# EAGLE board product (EAGLE 6.3)
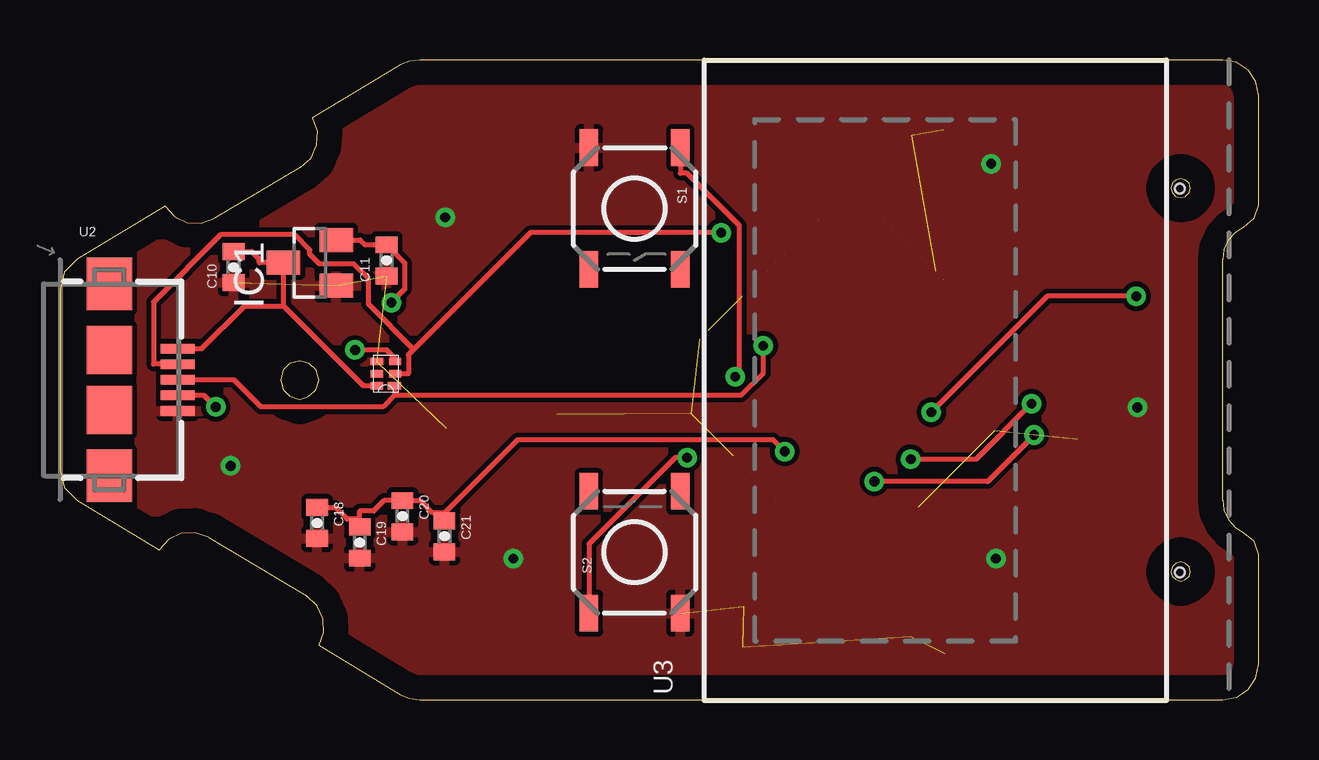
[diagram p0: board, top side]
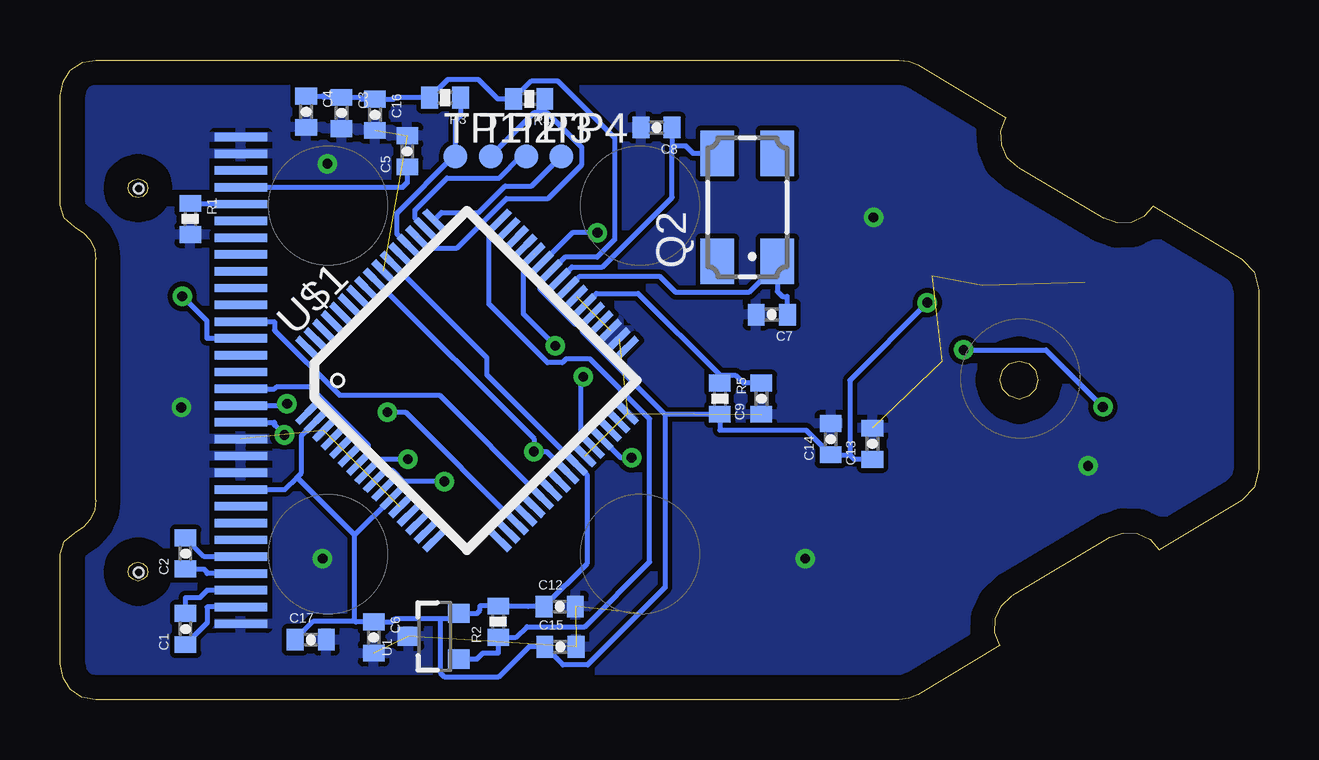
[diagram p1: board, bottom side, seen from below]

Size 49.96 x 26.67 mm. Coordinates in mm from the lower left corner, seen from the top.
Outline: 47.12,5.33 47.07,5.54 46.91,5.69 46.71,5.74 46.51,5.69 46.35,5.54 46.3,5.33 46.35,5.13 46.51,5 46.71,4.93 46.91,5 47.07,5.13 47.12,5.33
Outline: 47.12,21.34 47.07,21.54 46.91,21.67 46.71,21.72 46.51,21.67 46.35,21.54 46.3,21.34 46.35,21.13 46.51,20.98 46.71,20.93 46.91,20.98 47.07,21.13 47.12,21.34
Outline: 10.79,13.33 10.67,13.74 10.39,14.02 9.98,14.12 9.58,14.02 9.3,13.74 9.19,13.33 9.3,12.93 9.58,12.65 9.98,12.52 10.39,12.65 10.67,12.93 10.79,13.33
Outline: 4.39,20.57 0.71,18.36 0.18,17.83 0,17.07 0,9.58 0.18,8.84 0.71,8.31 4.14,6.25 4.52,6.68 5.05,6.93 5.64,6.96 6.2,6.76 10.29,4.32 10.72,3.91 10.97,3.38 11,2.79 10.79,2.26 14.2,0.2 14.58,0.05 14.99,0 48.46,0 49.05,0.1 49.53,0.43 49.83,0.91 49.96,1.5 49.96,6.05 49.78,6.6 49.35,6.96 49,7.19 48.69,7.52 48.51,7.9 48.46,8.33 48.46,18.34 48.51,18.77 48.69,19.15 49,19.48 49.35,19.71 49.78,20.07 49.96,20.62 49.96,25.17 49.83,25.76 49.53,26.24 49.02,26.57 48.46,26.67 14.99,26.67 14.58,26.62 14.2,26.47 10.54,24.26 10.74,23.7 10.69,23.11 10.46,22.58 10.03,22.2 6.45,20.07 5.89,19.86 5.31,19.89 4.78,20.14 4.39,20.57
Copper layers (1*16): Top 0.035mm / dielectric 1.5mm / Bottom 0.035mm
Design rules "default *": minimum track width 8mil, minimum drill 16mil, track to track 8mil, track to pad 8mil, pad to pad 8mil, via to via 8mil, smd to smd 8mil, copper to edge 40mil, drill to drill 8mil, minimum pad ring 8mil, minimum via ring 8mil, stop-mask expansion 4mil, vias tented up to drill 0mil, thermal gap 8mil

## Footprints (pad centres in the part's own frame; a part is rotated, then mirrored left to right if it is on the bottom)
0402-CAP = smd 0.7 x 0.9: 1 -0.65,0; 2 0.65,0
SOT23 = smd 1 x 1.4: 1 -0.95,-1.1; 2 0.95,-1.1; 3 0,1.1
CTS406 = smd 1.9 x 1.4: 1 -2.25,-1.25; 2 2.25,-1.25; 3 2.25,1.25; 4 -2.25,1.25
0402-RES = smd 0.7 x 0.9: 1 -0.65,0; 2 0.65,0
TACTILE_SWITCH_SMD = smd 1.524 x 0.762: 1 -2.54,1.905; 2 2.54,1.905; 3 -2.54,-1.905; 4 2.54,-1.905
TP10R = smd 1 x 1: TP 0,0
SOT23-3 = smd 0.8 x 0.9: 1 -0.95,-1; 2 0.95,-1; 3 0,1.1
USB-AB-MICRO-SMD = smd 1.4 x 0.4: D+ 2.85,0; D- 2.85,0.65; GND 2.85,-1.3; ID 2.85,-0.65; VBUS 2.85,1.3 | smd 1.9 x 2: P$6 0,1.25; P$7 0,-1.25 | smd 1.9 x 2.2: P$8 0,4; P$9 0,-4
UG-2864HSWEG01_0.96IN_WRAPAROUND = smd 0.35 x 2.2 bottom: 1 -10.15,-1.2; 2 -9.45,-1.2; 3 -8.75,-1.2; 4 -8.05,-1.2; 5 -7.35,-1.2; 6 -6.65,-1.2; 7 -5.95,-1.2; 8 -5.25,-1.2; 9 -4.55,-1.2; 10 -3.85,-1.2; 11 -3.15,-1.2; 12 -2.45,-1.2; 13 -1.75,-1.2; 14 -1.05,-1.2; 15 -0.35,-1.2; 16 0.35,-1.2; 17 1.05,-1.2; 18 1.75,-1.2; 19 2.45,-1.2; 20 3.15,-1.2; 21 3.85,-1.2; 22 4.55,-1.2; 23 5.25,-1.2; 24 5.95,-1.2; 25 6.65,-1.2; 26 7.35,-1.2; 27 8.05,-1.2; 28 8.75,-1.2; 29 9.45,-1.2; 30 10.15,-1.2 | hole 0.4: -8,-5.45; 8,-5.45
DRY6 = smd 0.559 x 0.305: 1 -0.356,0.508 | smd 0.508 x 0.305: 2 -0.381,0; 3 -0.381,-0.508; 4 0.381,-0.508; 5 0.381,0; 6 0.381,0.508
LQFP64 = smd 1.1 x 0.285: 1 -5.7,3.75; 2 -5.7,3.25; 3 -5.7,2.75; 4 -5.7,2.25; 5 -5.7,1.75; 6 -5.7,1.25; 7 -5.7,0.75; 8 -5.7,0.25; 9 -5.7,-0.25; 10 -5.7,-0.75; 11 -5.7,-1.25; 12 -5.7,-1.75; 13 -5.7,-2.25; 14 -5.7,-2.75; 15 -5.7,-3.25; 16 -5.7,-3.75; 33 5.7,-3.75; 34 5.7,-3.25; 35 5.7,-2.75; 36 5.7,-2.25; 37 5.7,-1.75; 38 5.7,-1.25; 39 5.7,-0.75; 40 5.7,-0.25; 41 5.7,0.25; 42 5.7,0.75; 43 5.7,1.25; 44 5.7,1.75; 45 5.7,2.25; 46 5.7,2.75; 47 5.7,3.25; 48 5.7,3.75 | smd 0.285 x 1.1: 17 -3.75,-5.7; 18 -3.25,-5.7; 19 -2.75,-5.7; 20 -2.25,-5.7; 21 -1.75,-5.7; 22 -1.25,-5.7; 23 -0.75,-5.7; 24 -0.25,-5.7; 25 0.25,-5.7; 26 0.75,-5.7; 27 1.25,-5.7; 28 1.75,-5.7; 29 2.25,-5.7; 30 2.75,-5.7; 31 3.25,-5.7; 32 3.75,-5.7; 49 3.75,5.7; 50 3.25,5.7; 51 2.75,5.7; 52 2.25,5.7; 53 1.75,5.7; 54 1.25,5.7; 55 0.75,5.7; 56 0.25,5.7; 57 -0.25,5.7; 58 -0.75,5.7; 59 -1.25,5.7; 60 -1.75,5.7; 61 -2.25,5.7; 62 -2.75,5.7; 63 -3.25,5.7; 64 -3.75,5.7

## Placement (x,y rotation side)
C1  1uF  [0402-CAP]  44.73,2.95 90 bottom
C2  1uF  [0402-CAP]  44.73,6.1 90 bottom
C3  104  [0402-CAP]  38.23,24.46 270 bottom
C4  1uF  [0402-CAP]  39.7,24.51 270 bottom
C5  1uF  [0402-CAP]  35.48,22.86 90 bottom
C6  0.1uF  [0402-CAP]  36.88,2.59 270 bottom
C7  10pF  [0402-CAP]  20.29,16.05 180 bottom
C8  10pF  [0402-CAP]  25.1,23.85 180 bottom
C9  0.1uF  [0402-CAP]  20.73,12.55 90 bottom
C10  1uF  [0402-CAP]  7.24,18.03 90 top
C11  1uF  [0402-CAP]  13.61,18.31 90 top
C12  0.1uF  [0402-CAP]  29.13,3.88 0 bottom
C13  0.01uF  [0402-CAP]  16.1,10.67 90 bottom
C14  0.1uF  [0402-CAP]  17.84,10.86 90 bottom
C15  0.01uF  [0402-CAP]  29.11,2.2 0 bottom
C16  0.01uF  [0402-CAP]  36.83,24.38 270 bottom
C17  1uF  [0402-CAP]  39.51,2.5 0 bottom
C18  1uF  [0402-CAP]  10.72,7.37 270 top
C19  0.1uF  [0402-CAP]  12.5,6.55 270 top
C20  2.2uF  [0402-CAP]  14.27,7.65 270 top
C21  0.1uF  [0402-CAP]  16.03,6.81 270 top
IC1  MCP1703CB  [SOT23]  10.41,18.21 90 top
Q2  16MHz  [CTS406]  21.31,20.52 90 bottom
R1  390k/560k  [0402-RES]  44.53,20.04 270 bottom
R2  100k  [0402-RES]  31.7,3.25 90 bottom
R3  10k  [0402-RES]  33.91,25.1 180 bottom
R4  10k  [0402-RES]  30.4,25.04 180 bottom
R5  10k  [0402-RES]  22.45,12.55 270 bottom
S1  SWITCH-MOMENTARY-2SMD  [TACTILE_SWITCH_SMD]  23.95,20.47 270 top
S2  SWITCH-MOMENTARY-2SMD  [TACTILE_SWITCH_SMD]  23.95,6.15 90 top
TP1  PTR1TP10R  [TP10R]  33.48,22.66 0 bottom
TP2  PTR1TP10R  [TP10R]  32,22.66 0 bottom
TP3  PTR1TP10R  [TP10R]  30.53,22.66 0 bottom
TP4  PTR1TP10R  [TP10R]  29.06,22.66 0 bottom
U1  ATSHA204-TSU  [SOT23-3]  34.34,2.64 90 bottom
U2  USB  [USB-AB-MICRO-SMD]  2.06,13.34 0 top
U3  DISPLAY  [UG-2864HSWEG01_0.96IN_WRAPAROUND]  41.22,13.31 90 top
U5  TPD4S012_DRY_6  [DRY6]  13.59,13.59 180 top
U$1  LM4F120H5QR  [LQFP64]  32.99,13.31 45 bottom

## Library data of the parts
C1-C21 R1-R5 = SparkFun-Passives
IC1 = linear
Q2 = crystal
S1 S2 = SparkFun-Electromechanical
TP1-TP4 = testpad
U1 = SparkFun-DigitalIC
U2 = SparkFun-Connectors
U3 = microbuilder
U5 = imported
U$1 = stellaris

## Nets
+3V3: C3.1 C4.1 C6.1 C11.2 C12.1 C13.1 C14.1 C15.1 C16.1 C17.1 IC1.2 R2.2 R3.2 R4.2 R5.2 U1.2 U3.9 U$1.2 U$1.11 U$1.26 U$1.37 U$1.42 U$1.54
+5V: C10.2 IC1.3 U2.VBUS U5.6
GND: C3.2 C4.2 C5.2 C6.2 C7.2 C8.2 C9.1 C10.1 C11.1 C12.2 C13.2 C14.2 C15.2 C16.2 C17.2 C18.2 C19.2 C20.2 C21.2 IC1.1 R1.2 S1.3 S2.3 U1.3 U2.GND U3.1 U3.10 U3.11 U3.12 U3.29 U3.30 U5.4 U$1.3 U$1.12 U$1.27 U$1.32 U$1.34 U$1.35 U$1.39 U$1.55
N$1: U3.19 U$1.22
N$2: U3.13 U$1.9
N$3: U2.ID U5.3
N$4: U3.15 U$1.7
N$5: U3.18 U$1.19
N$6: C5.1 U3.27
N$8: U3.14 U$1.8
N$9: R1.1 U3.26
N$10: C1.1 U3.2
N$11: C2.1 U3.4
N$12: C1.2 U3.3
N$13: C2.2 U3.5
N$14: S2.1 U$1.29
N$15: S1.1 U$1.28
N$16: R4.1 TP2.TP U$1.51
N$17: R3.1 TP1.TP U$1.52
N$19: TP3.TP U$1.50
N$20: TP4.TP U$1.49
N$21: C9.2 R5.1 U$1.38
N$23: C18.1 C19.1 C20.1 C21.1 U$1.25 U$1.56
SDA: R2.1 U1.1 U$1.48
USB_D_N: U2.D- U5.2 U$1.43
USB_D_P: U2.D+ U5.1 U$1.44
VCC: U3.28
VSS: U3.8
XTAL1: C7.1 Q2.1 U$1.40
XTAL2: C8.1 Q2.3 U$1.41

## Tracks (layer width: path | path; a pad name or v marks a point on that pad's centre or on a via)
+3V3  (via drill 0.41 pad 0.81)  (6 unrouted)
  Top 0.203: v13.81,16.55 14.37,17.11 14.37,18.21 C11.2 12.72,18.96 12.52,19.16 IC1.2
  Bottom 0.203: 28.19,15.64 28.48,15.64 29.96,17.12 29.96,17.41 U$1.42 28.92,18.45 27.57,18.45 26.85,19.17 26.85,23.43 29.21,25.8 30.3,25.8 R4.2 31.71,25.04 32.51,25.85 33.8,25.85 R3.2 36.01,25.1 36.07,25.03 C16.1 37.4,25.03 37.47,25.11 C3.1 38.98,25.11 39.03,25.16 C4.1 | 28.19,15.64 U$1.37 | 24.73,11.9 28.19,15.35 28.19,15.64 | U$1.54 32.16,14.25 32.16,13.54 U$1.26 27.98,9.36 27.98,5.68 C12.1 30.44,3.88 30.46,3.9 R2.2 32.08,3.9 32.45,3.9 32.45,3.72 32.59,3.59 U1.2 33.34,3.37 34.11,3.37 | 17.04,10.21 16.85,10.02 C13.1 | 17.04,10.21 C14.1 18.87,11.24 22.45,11.24 R5.2 24.73,11.9 | v13.81,16.55 17.04,13.32 17.04,10.21 | 24.73,11.9 24.73,4.68 27.96,1.45 29,1.45 C15.1 30.41,2.2 31.66,0.95 33.95,0.95 34.11,1.12 34.11,3.37 | 40.08,9.27 39.9,9.46 39.9,11 U$1.2 | 40.08,9.27 40.6,8.76 41.02,8.76 U3.9 | 37.67,6.86 40.08,9.27 | 37.67,6.86 U$1.11 | 37.67,3.28 37.67,6.86 | 37.67,3.28 37.64,3.24 C6.1 36.13,3.24 36,3.37 34.11,3.37 | C17.1 39.38,3.28 37.67,3.28
+5V
  Top 0.203: U2.VBUS 5.91,14.63 7.69,16.42 9.31,16.42 | 9.31,16.42 IC1.3 8.31,18.21 8.31,18.37 7.99,18.68 C10.2 | 9.31,16.42 12.65,13.08 U5.6
GND  (via drill 0.41 pad 0.81)  (16 unrouted)
  other vias: 7.11,9.74 16.05,20.11 18.9,5.88 39.01,5.88 38.81,22.34 44.91,12.18
  pour Bottom: 50.98,27 -1.04,27 -1.04,-0.43 50.98,-0.43
  pour Top: -1.04,27.2 50.98,27.2 50.98,-0.43 -1.04,-0.43
N$1  (1 unrouted)
  Bottom 0.203: U$1.22 34.15,12.69 38.32,12.69 41.02,15.4 41.02,15.76 U3.19
N$2  (via drill 0.41 pad 0.81)  (1 unrouted)
  Top 0.203: v40.61,11.03 38.67,9.1 v33.94,9.1
  Bottom 0.203: U3.13 41.02,11.56 41.02,11.45 v40.61,11.03 | v33.94,9.1 35.63,9.1 36.09,9.55 36.4,9.55 U$1.9
N$3  (via drill 0.41 pad 0.81)
  Top 0.203: v6.49,12.2 6.01,12.68 U2.ID | U5.3 13.97,14.23 13.62,14.58 v12.3,14.58
  Bottom 0.203: v12.3,14.58 8.87,14.58 v6.49,12.2
N$4  (1 unrouted)
  Bottom 0.203: U3.15 41.02,12.96 40.93,13.05 39.56,13.05 37.11,10.61 37.11,10.25 U$1.7
N$5  (via drill 0.41 pad 0.81)  (1 unrouted)
  Top 0.203: v44.86,16.82 41.16,16.82 v36.32,11.98
  Bottom 0.203: U3.18 43.83,15.06 43.83,15.78 v44.86,16.82 | v36.32,11.98 35.56,11.98 U$1.19
N$6
  Bottom 0.203: C5.1 35.48,21.56 35.68,21.36 U3.27
N$8  (via drill 0.41 pad 0.81)  (1 unrouted)
  Top 0.203: v40.5,12.34 38.18,10.02 v35.46,10.02
  Bottom 0.203: v35.46,10.02 36.63,10.02 U$1.8 | U3.14 40.58,12.26 v40.5,12.34
N$9
  Bottom 0.203: R1.1 43.77,20.69 43.74,20.66 U3.26
N$10
  Bottom 0.203: U3.2 43.83,3.86 43.83,3.2 C1.1
N$11
  Bottom 0.203: U3.4 43.83,5.26 43.83,5.3 43.97,5.45 C2.1
N$12
  Bottom 0.203: C1.2 44.73,4.25 44.14,4.25 43.83,4.56 U3.3
N$13
  Bottom 0.203: U3.5 43.94,5.96 C2.2
N$14  (via drill 0.41 pad 0.81)  (1 unrouted)
  Top 0.203: v26.14,10.09 25.65,10.09 22.05,6.48 S2.1
  Bottom 0.203: U$1.29 26.59,10.09 v26.14,10.09
N$15  (via drill 0.41 pad 0.81)  (1 unrouted)
  Top 0.203: v28.15,13.46 28.32,13.63 28.32,19.77 26.14,21.95 25.86,21.95 S1.1
  Bottom 0.203: U$1.28 28.24,11.03 28.24,13.37 v28.15,13.46
N$16  (1 unrouted)
  Bottom 0.203: U$1.51 34.63,18.84 33.41,18.84 31.35,20.89 29.62,20.89 28.21,22.31 28.21,23.02 29.65,24.46 29.75,24.46 | 29.75,24.46 30.2,24.46 TP2.TP | 29.75,24.46 29.75,24.58 R4.1
N$17  (1 unrouted)
  Bottom 0.203: R3.1 33.26,24.34 33.48,24.12 TP1.TP 33.55,22.66 35.91,20.29 35.91,19.41 U$1.52
N$19  (1 unrouted)
  Bottom 0.203: U$1.50 35.17,20.08 35.17,20.41 33.83,21.75 31.65,21.75 30.74,22.66 TP3.TP
N$20  (1 unrouted)
  Bottom 0.203: U$1.49 34.06,20.31 | 34.06,20.31 | 34.06,20.31 32.51,20.31 31.41,21.41 30.3,21.41 TP4.TP
N$21  (1 unrouted)
  Bottom 0.203: U$1.38 27.6,16.94 25.87,16.94 22.45,13.52 | C9.2 21.48,13.2 21.81,13.52 22.45,13.52 | R5.1 22.45,13.52
N$23  (via drill 0.41 pad 0.81)  (2 unrouted)
  Top 0.203: v30.21,10.34 29.72,10.83 19.07,10.83 16.03,7.78 | 16.03,7.78 15.54,7.78 15.03,8.3 C20.1 13.52,8.3 13.08,7.86 12.5,7.86 12.5,7.53 | C21.1 16.03,7.78 | C18.1 11.47,8.02 11.96,7.53 12.5,7.53 | C19.1 12.5,7.53
  Bottom 0.203: U$1.25 29.67,10.34 v30.21,10.34 30.21,10.88 U$1.56
SDA  (1 unrouted)
  Bottom 0.203: U$1.48 32.09,19.52 32.09,16.49 29.64,14.05 29.02,14.05 28.86,14.2 27.88,14.2 25.38,11.71 25.38,5.74 28.08,3.04 30.5,3.04 30.94,2.6 R2.1 31.7,1.95 32.33,1.95 32.59,1.69 U1.1
USB_D_N  (via drill 0.41 pad 0.81)  (1 unrouted)
  Top 0.203: 14.75,14.6 14.53,14.38 14.53,13.59 U5.2 | v27.56,19.47 19.61,19.47 14.75,14.6 | 14.75,14.6 12.86,16.49 12.86,17.55 12.25,18.16 10.82,18.16 10.41,18.57 10.41,18.76 9.79,19.38 6.7,19.38 3.9,16.58 3.9,13.98 U2.D-
  Bottom 0.203: v27.56,19.47 28.6,19.47 U$1.43
USB_D_P  (via drill 0.41 pad 0.81)  (1 unrouted)
  Top 0.203: 13.94,12.69 13.46,12.21 8.38,12.21 7.25,13.33 U2.D+ | U5.1 13.94,12.69 | 13.94,12.69 28.4,12.69 29.32,13.61 v29.32,14.76
  Bottom 0.203: U$1.44 30.65,18.13 30.65,16.09 v29.32,14.76
XTAL1  (1 unrouted)
  Bottom 0.203: 20.06,18.17 21.25,16.98 24.29,16.98 24.94,17.63 28.32,17.63 U$1.40 | 20.06,18.17 20.06,17.02 19.85,16.81 19.64,16.81 C7.1 | Q2.1 20.06,18.17
XTAL2  (1 unrouted)
  Bottom 0.203: U$1.41 28.62,18.03 27.35,18.03 24.45,20.94 24.45,23.1 | C8.1 24.45,23.1 | 24.45,23.1 23.89,23.1 23.57,22.77 Q2.3